# Altium PCB NBP8 Xilinx Virtex-II Pro BGA456 Rev1.01.PcbDoc (part 4 of 4)
Units mm, origin at the board's own origin, x right, y up, seen from the top; angles counter-clockwise.
Board outline 69 x 99.5 mm, 8 copper layers (Top Layer, InternalPlane1, InternalPlane2, MidLayer1, MidLayer2, MidLayer3, MidLayer4, Bottom Layer), stack 1.545 mm thick; 164 components, 314 nets, 1132 pads, 807 vias.
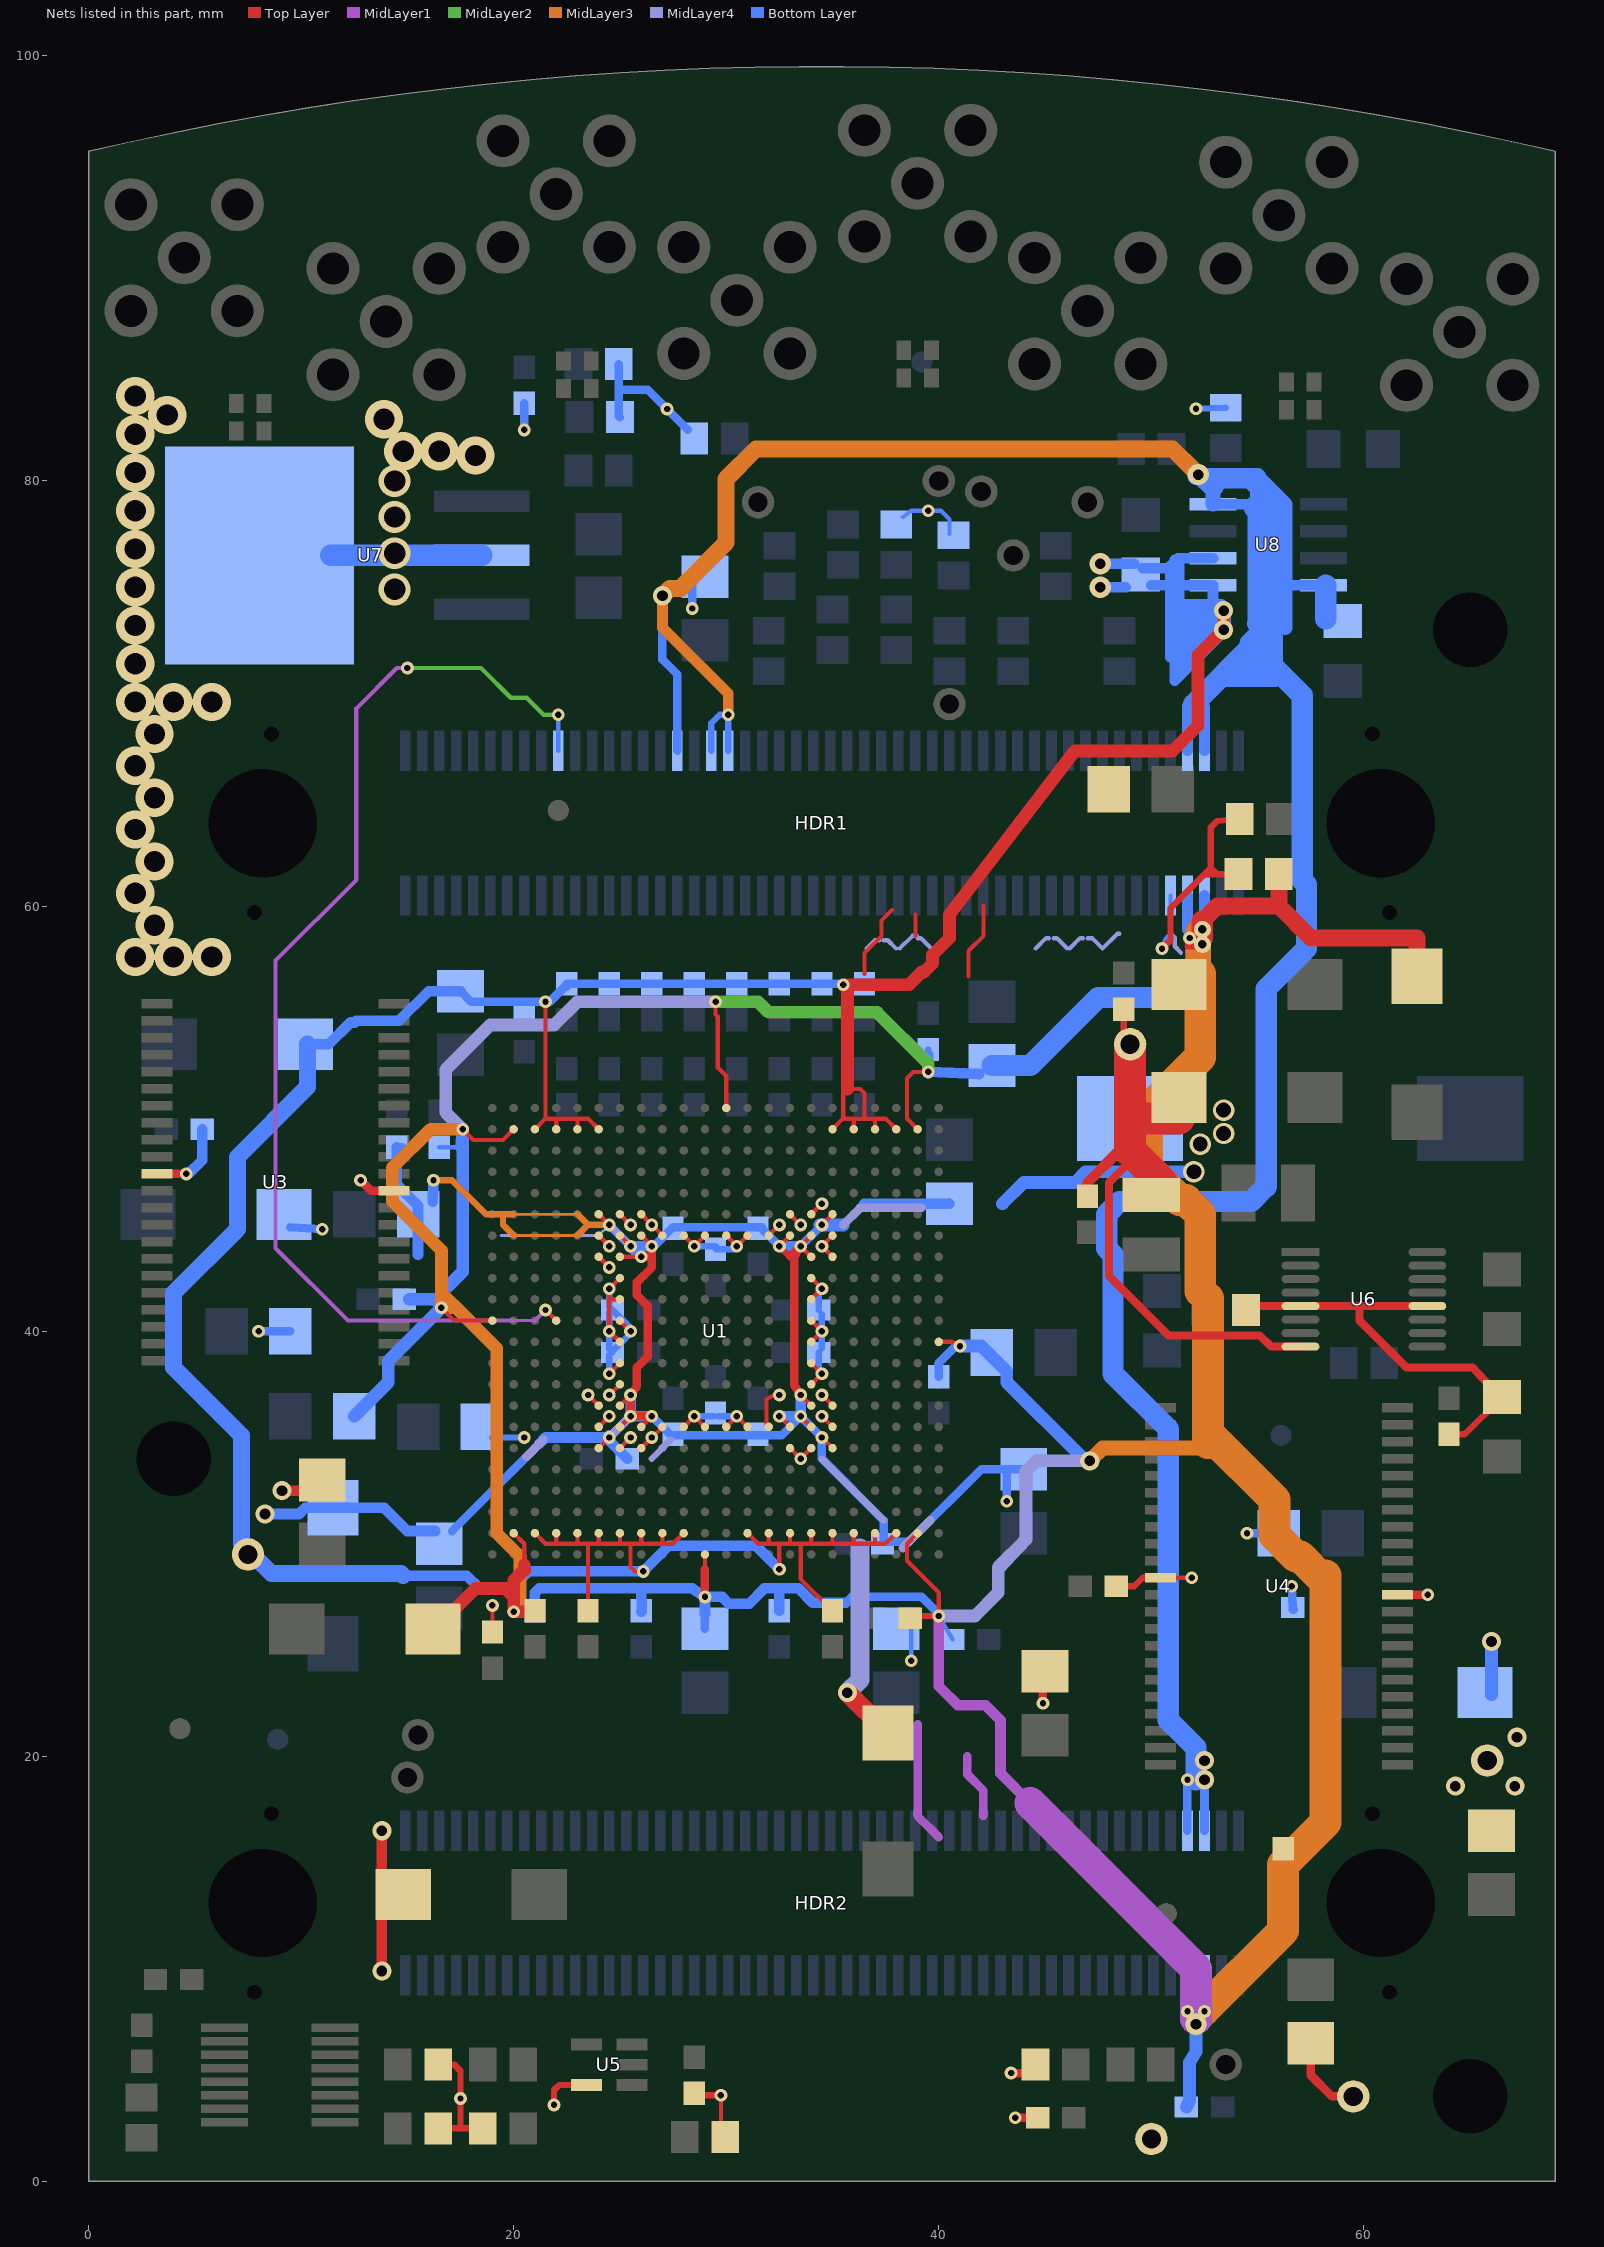
[diagram p10: the nets of this part, all layers, seen from the top]

## Via types
v1: diameter 0.6, hole 0.3, Top Layer to Bottom Layer, tented bottom, 695 vias
v2: diameter 0.9, hole 0.5, Top Layer to Bottom Layer, tented bottom, 45 vias
v3: diameter 1.8, hole 1, Top Layer to Bottom Layer, tented bottom, 26 vias
v4: diameter 1, hole 0.7, Top Layer to Bottom Layer, tented bottom, 17 vias
v5: diameter 1, hole 0.5, Top Layer to Bottom Layer, tented bottom, 15 vias
v6: diameter 1.5, hole 1, Top Layer to Bottom Layer, tented bottom, 4 vias
v7: diameter 0.8, hole 0.4, Top Layer to Bottom Layer, tented bottom, 3 vias
v8: diameter 0.9, hole 0.5, Top Layer to Bottom Layer, 2 vias

## Nets (pads, with @x,y where several pads share a name; then routed paths per layer and width w, separated by ;. In a path a pad name is that pad's centre, name@x,y a point inside that pad or via, vN(x,y) a via of type N, cw(c..) or ccw(c..) an arc to the next point about the centre after c; other vN are vias at no path point) (continued)
VCC: C9.1 C10.1 C11.1 C12.1 C13.1 C14.1 C15.1 C16.1 C17.1 C26.1 C27.1 C33.1 C35.1 C44.1 C45.1 C46.1 C47.1 C48.1 C49.1 C50.1 C56.1 C57.1 C58.1 C60.1 R10.1 R11.2 R12.1 R13.1 R14.2 R17.1 R19.2 R20.2 R23.1 R24.1 R27.2 TP11.1 U1.F7 U1.F8 U1.F15 U1.F16 U1.G6 U1.G9 U1.G10 U1.G11 U1.G12 U1.G13 U1.G14 U1.G17 U1.H6 U1.H17 U1.J7 U1.J16 U1.K7 U1.K16 U1.L7 U1.L16 U1.M7 U1.M16 U1.N7 U1.N16 U1.P7 U1.P16 U1.R6 U1.R17 U1.T6 U1.T9 U1.T10 U1.T11 U1.T12 U1.T13 U1.T14 U1.T17 U1.U7 U1.U8 U1.U15 U1.U16 U3.11 U3.33 U4.11 U4.33 U5.5 U7.2 U7.4 | length 118.6
  Top Layer w0.2: C33.1@19,25.85 v1(19,27.1) ; v1(23.5,37) U1.H17@24,36.5 ; U1.G17@24,35.5 v1(24.5,36) ; U1.R17@24,43.5 v1(24.5,43) ; U1.T17@24,44.5 v1(24.5,44) ; v1(24.5,37) U1.J16@25,37.5 ; v1(24.5,38) U1.K16@25,38.5 ; U1.L16@24.9,39.6 v1(24.5,40) 24.5,41.5 ; U1.F16@25,34.5 v1(25.5,35) ; U1.M16@25,40.4 25.1,40.4 v1(25.5,40) ; U1.N16@25,41.5 24.5,41.5 ; U1.P16@25,42.5 v1(24.5,42) 24.5,41.5 ; U1.U16@25,45.5 v1(25.5,45) ; U1.F15@26,34.5 v1(26.5,35) U1.G14@27,35.5 ; U1.U15@26,45.5 v1(26.5,45) U1.T14@27,44.5 ; U1.T13@28,44.5 v1(28.5,44) U1.T12@29,44.5 ; U1.G13@28.1,35.5 28.1,35.6 v1(28.5,36) U1.G12@29,35.5 ; R14.2@29.75,2.15 v1(29.75,4.05) ; U1.G11@30,35.5 v1(30.5,36) U1.G10@31,35.5 ; U1.T11@30,44.5 v1(30.5,44) U1.T10@31,44.5 ; U1.G9@32,35.5 31.9,35.6 31.9,36.8 32.25,37 v1(32.5,37) ; U1.T9@32,44.5 v1(32.5,45) ; U1.F8@33,34.5 v1(33.5,34) U1.F7@34,34.5 ; U1.U8@33,45.5 v1(33.5,45) ; U1.J7@34,37.5 v1(34.5,38) U1.K7@34,38.5 ; U1.L7@34,39.5 v1(34.5,40) U1.M7@34,40.5 ; U1.N7@34,41.5 v1(34.5,42) U1.P7@34,42.5 ; U1.U7@34,45.5 v1(34.5,46) ; v1(34.5,36) U1.G6@35,35.5 ; v1(34.5,37) U1.H6@35,36.5 ; U1.R6@35,43.5 v1(34.5,44) U1.T6@35,44.5 ; C44.1@44.9,24 44.95,24.05 C44.1@45,24.1 ; U4.11@50.5,28.4 v1(51.9,28.4)
  Top Layer w0.3: R17.1@16.45,2.5 17.5,2.5 ; R10.1@16.45,5.5 17.2,5.5 17.5,5.2 v1(17.5,3.9) 17.5,2.5 ; R20.2@18.55,2.5 17.5,2.5 ; v1(21.9,3.6) 21.9,4.3 22.141,4.541 U5.5@23.42,4.541 ; C35.1@28.5,4.05 v1(29.75,4.05) ; C27.1@48.35,28 49.2,28 49.6,28.4 U4.11@50.425,28.4
  Top Layer w0.4: U3.11@2.925,47.4 U3.11@3.225,47.4 4.4,47.4 v1(4.6,47.4) ; v1(12.8,47.1) 13.3,46.6 U3.33@14.375,46.6 U3.33@14.9,46.6 ; v1(43.4,5.1) 44.4,5.1 44.6,5.3 R19.2@44.6,5.5 ; v1(43.6,3) C13.1@44.65,3 C13.1@44.7,3 ; v1(44.9,22.5) C44.1@44.9,24 ; C60.1@57.5,6.5 57.5,5 58.5,4 TP11.1@59.5,4 ; U4.33@61.575,27.6 v1(63,27.6)
  Top Layer w0.5: v2(9.1,32.5) C46.1@11,32.5 ; v8(13.8,9.9) v8(13.8,16.5)
  Bottom Layer w0.2: R11.2@38.3,78.3 38.7,78.6 v1(39.5,78.6) 40.1,78.6 40.5,78.2 R13.1@40.5,77.5 ; v1(38.7,24.5) C48.1@38.7,26
  Bottom Layer w0.3: C50.1@19,35 v1(20.5,35) ; v1(24.5,38) 24.5,38.9 24.6,39 C14.1@24.65,39 24.5,39.15 v1(24.5,40) 24.5,40.9 24.6,41 C11.1@24.65,41 ; v1(24.5,42) 24.5,41.15 C11.1@24.65,41 ; C14.1@24.7,39.1 25.5,39.9 v1(25.5,40) 25.5,40.15 C11.1@24.65,41 ; v1(28.5,36) C12.1@29.4,36 ; v1(28.5,44) C10.1@29.5,44 ; C10.1@29.5,43.85 30.35,43.85 v1(30.5,44) ; C12.1@29.6,36 v1(30.5,36) ; C9.1@34.35,39 34.35,38.15 v1(34.5,38) ; C16.1@34.35,41 34.35,41.85 v1(34.5,42) ; C9.1@34.5,39.2 v1(34.5,40) C16.1@34.5,40.8 ; v1(52.1,83.4) R27.2@53.5,83.45
  Bottom Layer w0.4: v1(8,40) C47.1@9.5,40 ; C56.1@9.5,44.9 v1(11,44.8) ; v1(20.5,82.4) C17.1@20.5,83.65 ; R23.1@24.95,85.5 24.95,84.3 ; R24.1@25,83 24.95,83.05 24.95,84.3 ; R12.1@28.2,82.4 v1(27.218,83.382) 26.3,84.3 24.95,84.3 ; v1(28.4,74) C45.1@28.4,75.5 ; v1(54.5,30.5) C49.1@56,30.5 ; v1(56.6,28) 56.645,27 56.65,26.9 C15.1@56.7,26.9
  Bottom Layer w0.5: v1(4.6,47.4) 4.7,47.4 5.35,48.05 C26.1@5.35,49.5
  Bottom Layer w0.6: v2(66,25.4) 66,23 C57.1@66,22.9
  Bottom Layer w1: U7.4@11.4,76.5 14.4,76.5 U7.2@18.5,76.5
  other v3: 2.2,57.6 4,57.6 5.8,57.6 3.1,59.1 2.2,60.6 3.1,62.1 2.2,63.6 3.1,65.1 2.2,66.6 3.1,68.1 2.2,69.6 4,69.6 5.8,69.6 2.2,71.4 2.2,73.2 2.2,75 2.2,76.8 2.2,78.6 2.2,80.4 18.2,81.2 14.8,81.4 16.5,81.4 2.2,82.2 13.9,82.9 3.7,83.1 2.2,84
  other v6: 14.4,74.9 14.4,76.6 14.4,78.3 14.4,80
VCCAUX: C1.1 C2.1 C3.1 C4.1 C5.1 C6.1 C7.1 C28.1 C29.1 C30.1 C31.1 C36.1 C37.1 C38.1 C39.1 C51.1 C52.1 HDR1.93 HDR1.95 HDR2.93 HDR2.95 R15.1 TP14.1 U1.A12 U1.AA2 U1.AA21 U1.AB11 U1.B2 U1.B21 U1.L1 U1.M22 | length 312.9
  Top Layer w0.2: v1(16.6,41.1) 17.2,40.5 U1.M22@19,40.5 ; v1(17.6,49.5) 18.1,49 19.5,49 U1.AA21@20,49.5 ; 20,27.9 20,28.271 20,28.5 20.5,29 20.5,30 U1.B21@20,30.5 ; 29,28.8 U1.A12@29,29.5 ; v1(29.5,55.5) 29.5,54.9 29.6,54.8 29.6,52.4 30,52 U1.AB11@30,50.5 ; U1.B2@39,30.5 38.5,30 38.5,29.2 40,27.7 v1(40,26.6) ; U1.AA2@39,49.5 38.5,50 38.5,51.9 38.8,52.2 v1(39.5,52.2) ; U1.L1@40,39.5 40.6,39.5 v1@41,39.4
  Top Layer w0.3: C31.1@38.9,26.6 v1(40,26.6) ; 51.7,58.1 51.8,58.1 v7@52.4,58.1
  Top Layer w0.4: v1(29,27.5) 29,28.8
  Top Layer w0.6: C51.1@16.2,26 16.3,26 18.2,27.9 19.6,27.9 ; 20.5,29 20.5,28.771 ; 20.529,28.771 20.5,28.771 ; C30.1@20.7,26.8 v1(20,26.8) 20,27.5 ; 19.6,27.9 20,27.5 ; 19.6,27.9 20,27.9 ; 20,27.5 20,27.9 ; 20,27.9 20,28.271 20.5,28.771
  Top Layer w0.8: v7@52.4,59.3 53.1,60 56,60 ; R15.1@56,61.5 56,60 ; C52.1@62.5,56.7 62.5,58.5 57.5,58.5 56,60
  Top Layer w1: v7@52.4,58.5 v7(52.4,58.9) v7@52.4,59.3
  MidLayer1 w0.4: 39,21.5 39,17.2 40,16.2 ; 41.342,20 41.342,19.158 42.1,18.4 42.1,17.2
  MidLayer1 w0.5: v1(40,26.6) 40,23.3 40.9,22.4 42.2,22.4 42.9,21.7 42.9,19.2 44.3,17.8
  MidLayer1 w1.5: 44.3,17.8 52.1,10 52.1,8 v5@52.1,7.663
  MidLayer2 w0.6: v1(29.5,55.5) 31.5,55.5 32,55 37.1,55 39.5,52.6 v1(39.5,52.2)
  MidLayer3 w0.6: v1(17.6,49.5) 16.1,49.5 14.3,47.7 14.3,46.1 16.6,43.8 16.6,41.8 ; v1(20,26.8) 20.3,27.1 20.3,29.4 19.2,30.5 19.2,39.2 17.3,41.1 ; 16.6,41.8 v1(16.6,41.1) 17.3,41.1 ; 16.6,41.8 16.95,41.45 17.3,41.1
  MidLayer3 w0.7: v2(47.1,33.9) 47.7,34.5 52.3,34.5
  MidLayer3 w1.2: v7@52.2,58.8 52.2,58.5 52.2,58.2 52.2,56.9 52.3,56.8
  MidLayer3 w1.5: v5@52.1,7.7 52.45,8.05 56.2,11.8 56.2,14.9 58.2,16.9 58.2,28.5 57.9,28.5 57,29.4 56.8,29.4 55.8,30.4 55.8,32.069 52.669,35.2 ; 52.3,56.8 52.3,52.9 49.8,50.4 49.8,47.7 51.325,46.175 51.625,46.175 52.3,45.5 52.3,41.9 52.669,41.531 52.669,35.2 ; 52.669,34.731 52.669,35.2
  MidLayer4 w0.6: v1(17.6,49.5) 16.8,50.3 16.8,52.3 18.9,54.4 21.9,54.4 23,55.5 v1(29.5,55.5) ; v1(40,26.6) 41.7,26.6 42.8,27.7 42.8,28.8 44.1,30.2 ; 42.8,28.9 44.1,30.2 ; v2(47.1,33.9) 44.6,33.9 44.1,33.4 44.1,30.2
  Bottom Layer w0.2: C4.1@16.5,48.65 17.35,48.65 17.563,48.863 17.6,48.9 v1(17.6,49.5) v1@17.6,49.6 ; v1(20,26.8) 20.95,26.8 C1.1@21,26.85 ; v1(40,26.6) C2.1@40.65,25.5 ; HDR2.93@51.7,9.6 HDR2.93@51.7,9.7
  Bottom Layer w0.3: v1(39.5,52.2) C5.1@39.5,53.25
  Bottom Layer w0.38: C29.1@15.1,41.5 16.1,41.5 v1(16.6,41.1) ; v1(41,39.3) C39.1@41.8,39.3
  Bottom Layer w0.4: C37.1@29,26 v1(29,27.5) ; 35.617,27.217 35.9,27.5 39.2,27.5 40,26.7 v1(40,26.6) ; C7.1@40,37.85 40,38.5 40.8,39.3 v1(41,39.3) ; HDR2.93@51.7,9.6 v1(51.7,8) ; HDR2.95@52.5,9.7 v1(52.5,8) ; v1(51.7,8) 52.1,8 v1(52.5,8) ; v1(51.7,8) 51.7,7.8 v5(52.1,7.4) 52.5,7.8 v1(52.5,8)
  Bottom Layer w0.5: v1(20,26.8) 20.05,26.85 C1.1@21,26.85 21,27.7 21.2,27.9 26,27.9 ; C3.1@26,26.8 26.025,26.825 26.024,26.851 26,27.9 ; C37.1@29,26.7 v1(29,27.5) ; C6.1@32.5,26.85 32.5,27.9 ; 35.617,27.217 34.083,27.217 33.4,27.9 32.5,27.9 ; C5.1@39.5,53 v1(39.5,52.2) C38.1@41.9,52.1 ; 51.7,58.9 HDR1.93@51.7,60.5 ; v7@52.5,58.9 HDR1.95@52.5,60.5 ; 26,27.9 28.4,27.9 v1(29,27.5) ; v1(29,27.5) 29.8,27.5 30.114,27.186 31.086,27.186 31.8,27.9 32.5,27.9
  Bottom Layer w0.6: C36.1@12.5,36 14.1,37.6 14.1,38.6 v1(16.6,41.1) 16.6,41.5 ; C29.1@15.1,41.5 16.1,41.5 16.6,41.5 ; 17.55,48.65 17.563,48.863 v1(17.6,49.5) 17.6,48.9 17.6,42.8 16.6,41.8 16.6,41.5 ; v1(41,39.3) 42,39.3 42.4,38.9 43.2,38.1 43.2,37.6 46.7,34.1 v2(47.1,33.9) ; C28.1@51.65,3.5 51.8,3.8 51.8,5.6 52.1,6.1 v5(52.1,7.4)
  Bottom Layer w1: C38.1@42.5,52.5 44.3,52.5 47.5,55.7 50.9,55.7 52.1,56.9 52.1,58.2 v1@52.1,58.5
  other v1: 51.8,58.5
  other v7: 52.4,58.2
VCCIN: C76.1 C88.1 C93.2 HDR1.34 HDR1.38 HDR1.40 HDR1.94 HDR1.96 HDR2.94 HDR2.96 TP13.1 U8.4 U8.8 | length 182.7
  MidLayer3 w0.5: v2(27,74.6) 27,73.1 30.1,70 v1(30.1,69)
  MidLayer3 w0.8: v2(27,74.6) 27.351,74.951 27.851,74.951 30,77.1 30,80.1 31.4,81.5 51,81.5 v5@52,80.5
  Bottom Layer w0.3: HDR1.38@29.3,67.3 29.3,68.6 29.7,69 v1(30.1,69) HDR1.40@30.1,67.3 ; v1(51.7,18.9) 52.1,18.9 v2(52.5,18.9)
  Bottom Layer w0.4: v2(27,74.6) 27,71.6 27.7,70.9 HDR1.34@27.7,67.3 ; HDR2.94@51.7,16.5 v1(51.7,18.9) ; HDR2.96@52.5,16.5 v2(52.5,18.9)
  Bottom Layer w0.5: HDR1.94@51.7,67.3 51.7,69.4 52.089,69.789 ; HDR1.96@52.5,67.3 52.5,69.377 52.189,69.689 52.089,69.789 ; U8.8@52.9,78.905 54.695,78.905 55.5,78.1 55.5,74.1 55.5,73.2 54.653,72.353 52.089,69.789 ; 55.6,74.7 55.7,74.8 55.9,75 55.9,75.095 ; 55.6,75.6 55.7,75.5 56,75.2 ; 55.805,75.095 55.9,75.095 ; U8.4@58.2,75.095 U8.4@58.1,75.095 56.3,75.095 55.9,75.095
  Bottom Layer w0.7: U8.8@52.9,78.905 52.9,79.6 53,79.7 53.3,80 54.6,80 55,79.6 ; 54.4,80.2 55,80.2 56.3,78.9 56.3,78.2 ; 55,78.7 55,79.5 ; 55,80 55,79.6 ; 56.3,73.1 56.3,75.095 56.3,78.2 ; 55,79.5 55,79.6 ; 55,79.5 56.3,78.2
  Bottom Layer w0.8: v5@52.1,80.2 52.2,80.2 v5@52.3,80.2 ; v5(52.2,80.3) v5@52.3,80.2 ; 55,80.2 v5@52.5,80.2 ; v5@52.3,80.2 52.8,79.7 53,79.7 v5@52.5,80.2 ; v5@52.3,80.2 v5@52.5,80.2
  Bottom Layer w1: 52,69.5 52.189,69.689 54.653,72.153 54.653,72.353 57.1,69.905 57.1,61.2 57.3,61 57.3,58 55.4,56.1 55.4,46.8 54.7,46.1 48.5,46.1 47.9,45.5 47.9,43.9 48.2,43.6 48.2,38 50.8,35.4 50.8,21.7 52.1,20.4 52.1,19.8 v2@52.1,18.9 ; 53.6,70.8 55.8,70.8 55.2,71.4 54.5,71.4 ; 54.741,72.441 55.5,73.2 55.7,73.4 ; 54.836,78.764 55.5,78.1 55.7,77.9 55.7,75.5 55.7,74.8 55.7,73.4 ; 55,73.3 55.013,73.313 55.013,73.713 ; 55.013,78.587 55.013,73.713 ; 55.5,74.1 55.4,74.1 55.013,73.713 ; 55.7,71.459 55.7,73.4 ; C93.2@58.2,73.5 U8.4@58.2,75.095
  other v2: 64.3,18.6 67.1,18.6 52.5,19.8 67.2,20.9
VCCINT: C18.1 C19.1 C20.1 C21.1 C22.1 C23.1 C24.1 C25.1 C34.1 C40.1 C41.1 C42.1 C43.1 C53.1 C54.1 C55.1 C61.1 C62.2 L1.2 TP10.1 U1.F6 U1.F17 U1.G7 U1.G8 U1.G15 U1.G16 U1.H7 U1.H16 U1.R7 U1.R16 U1.T7 U1.T8 U1.T15 U1.T16 U1.U6 U1.U17 U6.8 | length 207.5
  Top Layer w0.2: U1.F17@24,34.5 v1(24.5,35) ; U1.U17@24,45.5 v1(24.5,45) ; U1.H16@25,36.5 v1(25.5,37) ; U1.R16@25,43.5 v1(26,43.5) ; U1.T16@25,44.5 v1(25.5,44) ; U1.G16@25.1,35.5 U1.G16@25,35.5 v1(25.5,36) ; U1.G15@26,35.5 v1(26.5,36) ; U1.T15@26,44.5 v1(26.5,44) ; v1(32.5,36) U1.G8@33,35.5 ; v1(32.5,44) U1.T8@33,44.5 ; v1(33.5,36) U1.G7@34,35.5 ; v1(33.5,37) U1.H7@34,36.5 ; U1.R7@34,43.5 v1(33.5,44) U1.T7@34,44.5 ; v1(34.5,35) U1.F6@35,34.5 ; v1(34.5,45) U1.U6@35,45.5 ; 55.6,39.3 55.622,39.278
  Top Layer w0.3: v1(32.5,44) 32.984,43.516 ; 32.984,43.484 32.984,43.516 ; C22.1@48.7,55.15 48.7,53.9 TP10.1@49,53.5 ; 32.984,43.516 33.468,44 v1(33.5,44) 33.2,43.3 32.984,43.516
  Top Layer w0.38: 48.8,47.8 48,47 48,42.6 50.8,39.8 55.1,39.8 55.6,39.3 ; 55.622,39.278 U6.8@57.015,39.278
  Top Layer w0.4: v1(26,43.5) 26.5,43.5 ; v1(26.5,36) v1(25.5,36) v1(25.5,37) 25.8,37.4 25.8,38.3 26.3,38.8 26.3,41.2 25.8,41.7 25.8,42.3 26.5,43 26.5,43.5 ; v1(26.5,44) 26.5,43.5 ; v1(33.5,37) 33.2,37.468 33.2,43.3 33.2,43.7 v1(33.5,44)
  Top Layer w0.5: C25.1@47,46.35 47,47 48.5,48.5
  Top Layer w0.9: v2(35.7,23) 37.5,21.2 37.5,21.1 C53.1@37.5,21
  Top Layer w1.5: TP10.1@49,53.5 49,50.5 ; C62.2@50.5,46.5 50.5,47 49,48.5 49,50.5 ; C61.1@51.3,50 49.5,50 49,50.5
  MidLayer3 w0.127: 20,44.5 23,44.5 ; 20,45.5 23,45.5
  MidLayer3 w0.3: v1(16.229,47.1) 17.1,47.1 18.7,45.5 19.5,45.5 ; 20,44.5 19.5,45 19.5,45.5 ; 20,45.5 19.5,45.5 ; 23,44.5 23.5,45 ; 23,45.5 23.5,45 ; v1(24.5,45) 23.5,45
  MidLayer4 w0.127: 19.4,44.5 23.4,44.5 24,44.5 v1(24.5,45) 23.474,45 22.974,45.5 19.4,45.5
  MidLayer4 w0.2: 21.403,34.811 21.403,34.903 21.408,34.908 ; 36.5,30 37.5,30 ; 36.607,58 37.001,58.394 37.2,58.394 ; 37.4,58.394 37.599,58.394 37.993,58 ; 38.158,58 38.758,58.6 38.958,58.6 ; 39.012,58.492 39.149,58.492 39.642,58 ; 44.558,58 45.051,58.492 45.188,58.492 ; 45.412,58.492 45.549,58.492 46.042,58 ; 46.158,58 46.651,58.492 46.788,58.492 ; 47.012,58.492 47.214,58.492 47.706,58 48.407,58.7 48.5,58.7 ; 51,58.625 51.1,58.524 51.1,58.107 51.4,57.807
  MidLayer4 w0.3: v1(24.5,45) v1(25.5,44) ; 26.499,34.001 27.401,34.903 ; 34.5,34 37.403,31.097
  MidLayer4 w0.4: 20.597,34.097 21.403,34.903 ; v1(24.5,35) v1(25.5,36) ; 35.5,45 36.265,45.764 ; 36.275,45.8 39.2,45.8 ; 38.3,29.8 39.6,31.1
  MidLayer4 w0.9: v2(35.7,23) 36.3,23.6 36.3,29.8
  Bottom Layer w0.3: v1(26.5,44) v1@26.6,44
  Bottom Layer w0.4: C34.1@14.5,48.65 C34.1@14.75,48.65 ; C42.1@17.1,30.6 21.2,34.7 ; v1(24.5,35) v1(25.5,36) ; v1(24.5,45) v1(25.5,44) ; v1(26.5,36) 27.4,35.1 27.5,35.1 31.5,35.1 32.6,35.1 v1(33.5,36) v1(34.5,35) 34.5,34 37.4,31.1 37.4,30.1 38.6,30.1 42,33.5 C40.1@44,33.5 ; v1@26.6,44 27.475,44.875 27.5,44.9 31.5,44.9 C18.1@31.6,44.9 ; C18.1@31.7,44.9 C18.1@31.6,44.9 ; v1(32.5,44) C18.1@31.6,44.9 ; v1(33.5,44) v1(34.5,45) 35.5,45 36.5,46 ; C43.1@40.487,46.072 C43.1@40.499,46.072 ; v1(43.2,32) C40.1@43.2,33.4
  Bottom Layer w0.5: v2(8.3,31.4) 9.9,31.4 10.2,31.7 C54.1@11.5,31.7 13.9,31.7 15,30.6 C42.1@16.3,30.6 ; C34.1@14.5,48.65 14.5,46.9 15.5,45.9 C41.1@15.5,45.5 15.5,43.6 ; C41.1@16.2,46.1 v1(16.229,47.1) ; 21.2,34.7 21.5,35 24.4,35 24.45,35.05 24.5,35.1 v1(24.5,35) 24.5,34.85 C24.1@25.35,34 ; v1(25.5,37) v1(25.5,36) v1(26.5,36) ; v1(26,43.5) v1(25.5,44) 26,44 v1(26.5,44) ; v1(32.5,36) v1(33.5,36) v1(33.5,37) ; v1(32.5,44) v1(33.5,44) ; 36.5,46 C43.1@40.5,46
  Bottom Layer w0.6: v1@34.4,45 v1(34.5,45) 35.5,45 ; 43,46 44,47 46.4,47 46.9,47.5 v4(52,47.5)
  other v4: 52.3,48.8 53.4,49.3 53.4,50.4
VCCRIO: C77.1 C78.1 C79.1 C89.1 C90.1 C91.1 C92.2 L2.2 L3.2 L4.2 L5.2 L6.2 L7.2 L8.2 L9.2 TP12.1 U1.AA3 U1.AA4 U1.AA5 U1.AA6 U1.AA17 U1.AA18 U1.AA19 U1.AA20 U1.B3 U1.B4 U1.B5 U1.B6 U1.B7 U1.B8 U1.B9 U1.B10 U1.B13 U1.B14 U1.B15 U1.B16 U1.B17 U1.B18 U1.B19 U1.B20 U8.5 U8.6 | length 223.1
  Top Layer w0.2: U1.B20@21,30.5 21.5,30 23.5,30 ; U1.AA20@21,49.5 21.5,50 ; v1(21.5,55.5) 21.5,50 ; 22,30 U1.B19@22,30.5 ; U1.AA19@22,49.5 22,50 ; 23,30 U1.B18@23,30.5 ; U1.AA18@23,49.5 23,50 ; C78.1@23.5,26.85 23.5,30 ; 24,30 U1.B17@24,30.5 ; U1.AA17@24,49.5 23.5,50 23,50 ; 25,30 U1.B16@25,30.5 ; 26,30 U1.B15@26,30.5 ; v1(26.1,28.7) 25.7,28.7 25.5,28.9 25.5,30 ; 27,30 U1.B14@27,30.5 ; U1.B13@28,30.5 27.5,30 25.5,30 ; U1.B10@31,30.5 31.5,30 32,30 ; U1.B9@32,30.5 32,30 ; v1(32.5,28.8) 32.5,30 ; U1.B8@33,30.5 33,30 ; U1.B7@34,30.5 34,30 ; C79.1@35,26.85 33.5,28.35 33.5,30 ; U1.B6@35,30.5 35,30 ; U1.AA6@35,49.5 35.5,50 ; v1(35.5,56.3) 35.5,51.4 ; 36,30 U1.B5@36,30.5 ; U1.AA5@36,49.5 36,50 ; 36.5,56.8 36.5,57.8 37.3,58.6 37.3,59.317 37.8,59.817 ; 37,30 U1.B4@37,30.5 ; U1.AA4@37,49.5 37,50 ; U1.B3@38,30.5 37.5,30 35,30 ; U1.AA3@38,49.5 37.5,50 37,50 ; 38.9,58.6 38.9,59.6 ; 41.4,56.7 41.4,57.9 42.1,58.6 42.1,60 ; 21.5,50 23,50 ; 23.5,30 25.5,30 ; 32,30 32.5,30 ; 32.5,30 33,30 ; 33,30 33.5,30 ; 33.5,30 34,30 ; 34,30 35,30 ; 35.5,50 36,50 ; 35.5,50 35.5,51.4 ; 35.5,51.4 35.7,51.4 36.3,51.4 36.5,51.2 36.5,50 ; 36,50 36.5,50 ; 36.5,50 37,50
  Top Layer w0.6: 35.7,51.4 35.7,56.1 v1(35.5,56.3) 38.6,56.3 39.2,56.9 39.3,56.9 39.7,57.3 39.7,57.7 40.5,58.5 40.5,59.6 46.4,67.3 51,67.3 52.2,68.5 52.2,71.8 v2(53.4,73) v2(53.4,73.9)
  Bottom Layer w0.4: C89.1@17.5,56 18,55.5 20.5,55.5 v1(21.5,55.5) 21.7,55.5 L2.2@22.5,56.3 ; L2.2@22.5,56.2 L2.2@22.5,56.3 ; L8.2@36.5,56.35 35.5,56.35 L9.2@34.5,56.35 L7.2@32.5,56.35 L6.2@30.5,56.35 L4.2@28.5,56.35 L5.2@26.5,56.35 L3.2@24.5,56.35 L2.2@22.5,56.35 L2.2@22.5,56.3
  Bottom Layer w0.5: C91.1@10.2,53.5 10.3,53.5 11.3,53.5 12.323,54.523 12.523,54.523 12.6,54.6 14.6,54.6 16,56 C89.1@17.5,56 ; 14.8,28.5 17.8,28.5 18.4,27.9 19.9,27.9 20.7,28.7 v1(26.1,28.7) 27.3,29.9 31.4,29.9 v1(32.5,28.8) ; v5(47.6,75) C92.2@48.8,75 ; v5(47.6,76.1) C92.2@49.2,76.1 ; C92.2@49.6,75.9 50.8,75.9 50.9,76 ; C92.2@50,75.1 50.005,75.095 50.9,75.095 ; 51.1,76.3 51.1,76.2 ; U8.6@52.9,76.365 51.265,76.365 51.1,76.2 ; 50.9,75.095 50.9,71.7 51.1,71.9 ; 50.9,75.095 50.9,76 ; 50.9,75.095 51.1,75.095 ; 50.9,76 51,76.1 ; 51,76.1 51.1,76.1 ; 51,76.1 51.1,76.2 ; 51.1,71.9 51.4,72.2 ; 51.1,71.9 51.1,70.6 53.45,72.95 53.5,73 53.5,73.9 53.5,74 53.3,74.2 52.9,74.2 ; 51.1,71.9 51.1,73.9 ; 51.1,73.9 51.25,74.05 ; 51.1,73.9 51.1,74.2 ; 51.1,74.2 51.25,74.05 ; 51.1,74.2 51.1,75.095 ; 51.1,74.2 51.3,74.2 ; 51.1,75.095 51.1,76.1 ; 51.1,75.095 51.3,75.095 ; 51.1,76.1 51.1,76.2 ; 51.1,76.1 51.3,76.1 51.3,75.095 ; 51.25,74.05 51.3,74.1 51.3,74.2 ; 51.25,74.05 51.4,73.9 51.4,72.2 ; 51.3,74.2 51.3,75.095 ; 51.3,74.2 52.9,74.2 ; 51.3,75.095 U8.5@52.9,75.095 52.9,74.2 ; 51.4,72.2 51.7,72.5 ; 51.4,72.2 51.4,71.4 53,73 53,73.9 52.9,73.8 52.7,73.8 ; 51.7,72.5 51.9,72.7 51.9,73 ; 51.7,72.5 51.7,72.2 52.6,73.1 52.6,73.5 52.4,73.5 51.9,73 ; 51.7,72.5 51.7,73.7 51.6,73.8 51.9,73.8 ; 51.9,73 51.9,73.8 ; 51.9,73.8 52.7,73.8 ; 52.7,73.8 52.9,74 52.9,74.2
  Bottom Layer w0.8: C91.1@10.3,53.5 10.3,51.5 7,48.2 7,44.8 4,41.8 4,38.3 7.2,35.1 7.2,30 7.6,29.6 8.6,28.6 14.7,28.6 14.8,28.5
VDRIVE: HDR1.20 U1.M19 | length 54.9
  Top Layer w0.2: v1(21.5,41) U1.M19@22,40.5
  MidLayer1 w0.127: 20,40.5 21,40.5
  MidLayer1 w0.2: v1(15,71.2) 14.5,71.2 12.6,69.3 12.6,61.234 8.8,57.434 8.8,43.9 12.2,40.5 20,40.5 ; 21,40.5 v1(21.5,41)
  MidLayer2 w0.2: v1(15,71.2) 18.466,71.2 19.866,69.8 20.6,69.8 21.4,69 v1(22.1,69)
  Bottom Layer w0.2: HDR1.20@22.1,67.3 v1(22.1,69)
VFILT: C64.1 C65.2 R21.1 U6.5 U6.12 | length 20.4
  Top Layer w0.3: C64.1@64,35.15 64.75,35.15 C65.2@66.5,36.9
  Top Layer w0.38: R21.1@54.517,41.183 U6.5@57.015,41.183 59.8,41.183 ; U6.12@62.385,41.183 59.8,41.183 ; C65.2@66,37 C65.2@66.3,37 ; C65.2@66.6,37 66.5,37 C65.2@66.3,37 ; 59.8,41.183 59.8,40.5 62,38.3 65.1,38.3 C65.2@66.3,37
VREF: HDR1.91 R15.2 R16.1 | length 13.1
  Top Layer w0.3: v1(50.5,58) 50.9,58.4 50.9,59.9 52.5,61.5 ; R15.2@54.1,61.5 53.1,61.5 ; R16.1@54.15,64.1 53.1,64 52.8,63.7 52.8,61.8 ; 52.5,61.5 52.8,61.8 ; 52.5,61.5 52.8,61.5 ; 52.8,61.5 53.1,61.5 ; 52.8,61.5 52.8,61.8 ; 52.8,61.8 53.1,61.5
  Bottom Layer w0.2: v1(50.5,58) 50.7,58.5 50.9,58.7 HDR1.91@50.9,60.5
pads on no net: HDR1.MH1 HDR1.MH2 HDR1.MH3 HDR1.MH4 HDR1.MH5 HDR1.MH6 HDR2.MH1 HDR2.MH2 HDR2.MH3 HDR2.MH4 HDR2.MH5 HDR2.MH6 U1.A3 U1.A4 U1.A5 U1.A6 U1.A7 U1.A8 U1.A9 U1.A10 U1.A13 U1.A14 U1.A15 U1.A16 U1.A17 U1.A18 U1.A19 U1.A20 U1.AB3 U1.AB4 U1.AB5 U1.AB6 U1.AB17 U1.AB18 U1.AB19 U1.AB20 U1.C18 U1.C19 U1.Y19 U2.1 U2.5 U2.9 U2.13 U2.16 U5.1 U6.11 U8.2

## Polygon pours and split planes (outlines as drawn)
VCCIN on Top Layer "Top Layer-VCCIN" (solid, remove dead copper, pour order 1000): 50.8,15.1 69,15.1 69,21.6 50.8,21.6
VCCRIO on Top Layer "Top Layer-VCCRIO" (solid, remove dead copper, pour order 1001): 53.2,78.1 58.4,72.9 56,70.5 56,65.2 37.8,47 32,52.8 29.8,55
GND on Top Layer "Top Layer-GND" (solid, remove dead copper, pour order 1002): 0,99.5 69,99.5 69,0 0,0
VCC on Top Layer "Top Layer-VCC" (solid, remove dead copper, pour order 1003): 0,99.5 0,53 23,53 23,99.5
GND on MidLayer1 "MidLayer1-GND" (solid, remove dead copper, pour order 1004): 0,99.5 69,99.5 69,0 0,0
VCCAUX on MidLayer1 "MidLayer1-VCCAUX" (solid, remove dead copper, pour order 1005): 36.1,31.5 36.1,0 57.1,0 57.1,31.5
GND on MidLayer2 "MidLayer2-GND" (solid, remove dead copper, pour order 1006): 0,99.5 69,99.5 69,0 0,0
GND on MidLayer3 "MidLayer3-GND" (solid, remove dead copper, pour order 1007): 0,99.5 69,99.5 69,0 0,0
VCCIN on MidLayer3 "MidLayer3-VCCIN" (solid, remove dead copper, pour order 1008): 25.5,82.7 25.5,67.1 31.5,67.1 37.4,73 60.2,73 60.2,16.6 68.7,16.6 68.7,82.5 26.8,82.5
VCCAUX on MidLayer3 "MidLayer3-VCCAUX" (solid, remove dead copper, pour order 1009): 13.5,50.3 21.3,50.3 21.3,23 13.6,23 13.6,50.3
VCCAUX on MidLayer3 "MidLayer3-VCCAUX 1" (solid, remove dead copper, pour order 1010): 44.9,60.7 44.9,5.6 55.1,5.6 61,11.5 61,60.5 44.9,60.5
GND on MidLayer4 "MidLayer4-GND" (solid, remove dead copper, pour order 1011): 0,99.5 69,99.5 69,0 0,0
VCCINT on MidLayer4 "MidLayer4-VCCINT" (solid, remove dead copper, pour order 1012): 7.4,60.4 54.2,60.4 54.2,29.5 7.487,29.5
GND on Bottom Layer "Bottom Layer-GND" (solid, remove dead copper, pour order 1013): 0,99.7 69,99.7 69,0 0,0
VCCINT on Bottom Layer "Bottom Layer-VCCINT" (solid, remove dead copper, pour order 1014): 0,56.4 69,56.4 69,21.3 0,21.3
VCC on Bottom Layer "Bottom Layer-VCC" (solid, remove dead copper, pour order 1015): 0,99.6 35,99.6 35,50.1 0,50.1
GND on InternalPlane1 (split plane): 36.23,98.49 37.96,98.46 39.69,98.41 41.418,98.34 43.146,98.251 44.873,98.141 46.598,98.011 48.322,97.861 50.044,97.692 51.764,97.502 53.481,97.293 55.196,97.064 56.908,96.815 58.617,96.546 60.323,96.258 62.026,95.95 63.725,95.622 65.42,95.275 67.11,94.908 67.998,94.704 67.999,1.001 1.001,1.001 1.002,94.704 1.89,94.908 3.58,95.275 5.275,95.622 6.974,95.95 8.677,96.258 10.383,96.546 12.092,96.815 13.804,97.064 15.519,97.293 17.236,97.502 18.956,97.692 20.678,97.861 22.402,98.011 24.127,98.141 25.854,98.251 27.582,98.34 29.31,98.41 31.04,98.46 32.77,98.49 34.5,98.5
VCC on InternalPlane2 (split plane): 36.23,98.49 37.96,98.46 39.69,98.41 41.418,98.34 43.146,98.251 44.873,98.141 46.598,98.011 48.322,97.861 50.044,97.692 51.764,97.502 53.481,97.293 55.196,97.064 56.908,96.815 58.617,96.546 60.323,96.258 62.026,95.95 63.725,95.622 65.42,95.275 67.11,94.908 67.998,94.704 67.999,1.001 1.001,1.001 1.002,94.704 1.89,94.908 3.58,95.275 5.275,95.622 6.974,95.95 8.677,96.258 10.383,96.546 12.092,96.815 13.804,97.064 15.519,97.293 17.236,97.502 18.956,97.692 20.678,97.861 22.402,98.011 24.127,98.141 25.854,98.251 27.582,98.34 29.31,98.41 31.04,98.46 32.77,98.49 34.5,98.5

## Keep-outs
Top Layer:
  circle w0.254: c50.7,12.6 r3.306
  circle w0.254: c4.3,21.3 r3.306
  circle w0.254: c22.1,64.5 r3.306
Bottom Layer:
  circle w0.254: c39.2,85.6 r3.324
  circle w0.254: c56.1,35.1 r3
  circle w0.254: c8.9,20.8 r3
  rectangle: 53.6,85.8 58.6,88.2
Keep-Out Layer:
  lines w0.2: 0.8,0.8 0.8,86.942 cw(c2,88) 0.8,89.058 0.8,91.942 cw(c2,93) 0.8,94.058 0.8,94.865 cw(c34.5,-51.301) 68.2,94.865 68.2,90.558 cw(c67,89.5) 68.2,88.442 68.2,85.558 cw(c67,84.5) 68.2,83.442 68.2,0.8 0.8,0.8
Mechanical 7:
  lines w0.2: 53.545,85.751 53.545,88.291 58.625,88.291 58.625,85.751 53.545,85.751

## Other copper
Top Layer:
  rectangle net VCCINT: 50.7,51.2 51.9,56.9
  rectangle net VCCAUX: 51.5,57.9 52.8,59.6
  rectangle net VCCINT: 51.9,49.2 52.7,50
  rectangle net VCCINT: 48.9,46.1 52.3,52.7
  rectangle net GND: 64.2,41.2 67.8,46.7
  rectangle net NetL1_1: 58.2,42.453 61.8,45.4
  rectangle net GND: 64.2,40.6 65.3,41.7
  rectangle net NetL1_1: 58.7,41.7 61.2,43
  rectangle net 5V: 53.3,42.3 55.7,47.8
  rectangle net VCCINT: 51.3,48.2 54,52.7
  rectangle net VCCINT: 51.1,45.6 53,48.5
  rectangle net GND: 56.2,45.7 60.5,57.7
  rectangle net GND: 57.3,45.7 67.7,53.5
  rectangle net 5V: 52.1,42.1 55.7,44.7
Bottom Layer:
  rectangle net VCCIN: 56,69.2 57.6,72.3
  rectangle net VCCIN: 54.9,70.4 57.7,72.4
  rectangle net VCCIN: 54.8,72 60.3,74.3
  rectangle net NetL1_1: 58.5,41.7 61.6,45.1
  rectangle net NetL1_1: 59.3,48.2 63.1,51.8
  rectangle net VCCAUX: 51.5,57.7 52.7,59.4
  rectangle net GND: 54.6,66.9 55.5,69.3
  rectangle net GND: 53.1,68.5 55.5,69.3
  rectangle net VCCINT: 46.5,47 53.9,52
  rectangle net 5V: 53.1,58 55,59.4
  rectangle net VCC: 12,72 15.7,81.6
  rectangle net VCC: 3,70.9 13.6,82.1
  rectangle net 5V: 52.9,42.2 55.8,44.5
  rectangle net VCCRIO: 49.8,73.4 51.1,74.5
  rectangle net GND: 53.3,18 54.9,20
  rectangle net VCCIN: 51.2,18.6 52.4,20.7

## Silkscreen, mask and mechanical layers (free items; w line width, h text height)
Top Overlay:
  lines w0.08: 13,1.1 14,1.4 ; 13.9,22 14.8,21.5 ; 16.1,6.8 16.1,8.6 ; 19.3,6.9 19.3,8.4 ; 23.9,7.4 23.9,8.5 ; 28.1,6.7 28.1,8.4 ; 30.7,77.6 31.2,78.3 ; 38.4,79.3 39.2,79.7 ; 40.8,77.6 41.6,78.7 ; 43.1,8.2 44.1,6.6 ; 44.1,76 45.5,75.2 ; 47.8,78.9 48.5,78.8 ; 47.9,6.9 47.9,8.2 ; 53.7,6.5 54.2,8.4 ; 57.9,46.6 58.9,46.6 ; 65.9,20.7 66.2,21.8
  lines w0.2: 8.1,91.2 9.9,94.1 ; 14.1,91 14.1,91.8 ; 15.7,94.9 18.4,93.7 ; 30.6,92 30.6,92.7 ; 32.3,96 35.5,93.9 ; 47,91.5 47,92.2 ; 49.5,95.3 52.5,92.7 ; 64.4,90.5 64.4,91.2
  text "RX1N" at 29.7,96.4 h1.4
  text "TX1P" at 46.8,95.7 h1.4
  text "TX0P" at 12.7,95.4 h1.4
  text "RX0N" at 7.2,94.6 h1.4
  text "TX0N" at 28,93.1 h1.4
  text "RX1P" at 44.6,92.6 h1.4
  text "RX0P" at 11.5,92.2 h1.4
  text "TX1N" at 61.8,91.6 h1.4
Bottom Overlay:
  drawing of 857 lines, arcs and shapes, not listed
  text "1" at 13.97,58.42 h1.2
  text "1" at 14.224,7.62 h1.2
  text "REV 1.01" at 36.5,2.7 h1.3
  text "NBP8" at 42.7,2.7 h1.3
PCB Boundary:
  lines w0.2: 0,0 0.001,95.5 cw(c34.5,-51.301) 68.999,95.5 69,0 0,0
  text "PCB boundary coincides with centre-line of tracks and arc" at 0,-12 h0.75
Gerber ID:
  text ".Layer_Name" at 0,-6 h0.75
Printout ID:
  text ".Printout_Name" at 0,-10 h0.75
Mechanical 5:
  circle w0.254: c64.5,87 r8
  circle w0.254: c56,92.5 r8
  circle w0.254: c39,94 r8
  circle w0.254: c47,88 r8
  circle w0.254: c22,93.5 r8
  circle w0.254: c30.5,88.5 r8
  circle w0.254: c14,87.5 r8
  circle w0.254: c4.5,90.5 r8
  circle w0.254: c4.5,90.5 r4.7
  circle w0.254: c14,87.5 r4.7
  circle w0.254: c22,93.5 r4.7
  circle w0.254: c30.5,88.5 r4.7
  circle w0.254: c39,94 r4.7
  circle w0.254: c56,92.5 r4.7
  circle w0.254: c47,88 r4.7
  circle w0.254: c64.5,87 r4.7
Mechanical 7:
  circle w0.2: c57.355,87.021 r0.6
  circle w0.2: c54.815,87.021 r0.6
  lines w0.2: 0.001,77 cw(c34.5,-69.801) 68.999,77 ; 0.001,79.5 cw(c34.5,-67.301) 68.999,79.5 ; 0,0 0.001,95.5 cw(c34.5,-51.301) 68.999,95.5 69,0 0,0
Design Information:
  drawing of 719 lines, arcs and shapes, not listed
  text "NBP8 REV 1.01" at 317.627,202.041 h1.27
  text "DESIGN INFORMATION" at 261.62,201.914 h1.52
  text "BOARD NAME:" at 299.212,201.914 h1.52
  text "BOARD TECHNOLOGY" at 261.62,199.374 h1.52
  text "BOARD SIZE (REFER ALSO PROFILING INFORMATION)" at 309.88,199.374 h1.27
  text "69.00mm" at 312.6,197.1 h1.52
  text "15.000" at 277.419,197.012 h1.52
  text "99.50mm" at 335.6,197 h1.52
  text "5.000" at 291.389,196.885 h1.52
  text "5" at 266.446,196.834 h1.52
  text "X" at 328.549,196.326 h1.78
  text "(MIN. TRACK/   PADS  /   CLEARANCE     IN 0.001'')" at 260.096,194.294 h1.27
  text "MINIMUM ANNULAR RING 0.05MM (0.002'') EXTERNAL PER IPC-2221 CLASS 3 LEVEL C AND IS THE" at 261.62,191.754 h1.27
  text "MANUFACTURING REGISTRATION ALLOWANCE" at 261.62,189.468 h1.27
  text "LAND SIZE CALCULATION MINIMUM - NOMINAL HOLE SIZE + 0.508MM (0.020'')" at 261.62,186.674 h1.27
  text "AS INSTRUCTED" at 347.65,182.28 h1.52
  text "X" at 299.263,182.153 h1.52
  text "CIRCUIT TYPE:" at 261.62,182.102 h1.52
  text "SS" at 284.48,182.102 h1.27
  text "DS" at 302.26,182.102 h1.27
  text "X" at 316.865,182.102 h1.52
  text "PTH" at 320.04,182.102 h1.27
  text "ML" at 330.962,182.102 h1.27
  text "X" at 334.772,182.102 h1.52
  text "No. OFF" at 337.82,182.102 h1.27
  text "FINGER CONNECTOR DIM PER:" at 261.62,179.054 h1.52
  text "AS SHOWN" at 337.82,179.054 h1.27
  text "No. OFF TOTAL" at 278.384,176.26 h1.52
  text "ONE SIDE" at 320.04,176.26 h1.27
  text "BOTH SIDES" at 337.82,176.006 h1.27
  text "VIAS:" at 261.62,173.339 h1.52
  text "NONE" at 273.05,173.339 h1.14
  text "X" at 281.432,173.339 h1.52
  text "FEED THRU'" at 284.48,173.339 h1.14
  text "X" at 299.212,173.339 h1.52
  text "TENTED" at 302.26,173.339 h1.14
  text "BURIED LAYER SEQUENCE" at 320.04,173.339 h1.14
  text "UNIQUE DRILL" at 284.48,170.291 h1.14
  text "2 SIZE" at 302.26,170.291 h1.14
  text "BLIND LAYER SEQUENCE" at 320.04,170.291 h1.14
  text "Layer Stack Manager (Protel)" at 297.053,168.005 h1.27
  text "X" at 334.772,168.005 h1.52
  text "AS SHOWN" at 337.82,168.005 h1.27
  text "LAYER CONSTRUCTION PER:" at 261.62,167.878 h1.52
  text "Protel" at 342.646,165.338 h1.27
  text "(PFW)" at 352.933,165.211 h1.27
  text "ARTWORK:" at 261.62,165.084 h1.52
  text "MANUAL" at 284.48,165.084 h1.27
  text "DIGITISED" at 302.26,165.084 h1.27
  text "X" at 316.992,165.084 h1.52
  text "CAD" at 320.04,165.084 h1.27
  text "TYPE" at 330.962,165.084 h1.27
  text "ARTWORK/PATTERN MASTER LIST" at 261.62,160.385 h1.52
  text "DESCRIPTION" at 262.89,157.972 h1.27
  text "DRAWING No./CAD FILE REF." at 281.559,157.972 h1.27
  text "LAYER NAME" at 322.834,157.972 h1.27
  text "GERBER FILE REF" at 343.586,157.896 h1.27
  text "PCB FILE" at 261.366,155.432 h1.27
  text "BOCD_Virtex_II_Pro_FG456" at 281.737,155.356 h1.27
  text "PcbDoc" at 312.979,155.356 h1.02
  text "Top Paste Mask" at 321.158,152.892 h1.02
  text "GTP" at 363.779,152.816 h1.27
  text "GERBER FILE" at 261.366,152.765 h1.27
  text "GTO" at 363.728,150.327 h1.27
  text "Top Overlay" at 321.158,150.301 h1.02
  text "GERBER FILE" at 261.366,150.225 h1.27
  text "Top Solder Mask" at 321.158,147.863 h1.02
  text "GTS" at 363.779,147.736 h1.27
  text "GERBER FILE" at 261.366,147.685 h1.27
  text "TOP LAYER" at 321.158,145.272 h1.02
  text "GTL" at 363.779,145.196 h1.27
  text "GERBER FILE" at 261.366,145.145 h1.27
  text "INTERNALPLANE1" at 321.158,142.732 h1.02
  text "GP1" at 363.779,142.656 h1.27
  text "GERBER FILE" at 261.366,142.605 h1.27
  text "INTERNALPLANE2" at 321.158,140.192 h1.02
  text "GP2" at 363.728,140.167 h1.27
  text "GERBER FILE" at 261.366,140.065 h1.27
  text "G1" at 363.728,137.754 h1.27
  text "MIDLAYER1" at 321.158,137.652 h1.02
  text "GERBER FILE" at 261.366,137.525 h1.27
  text "MIDLAYER2" at 321.158,135.112 h1.02
  text "G2" at 363.728,135.087 h1.27
  text "GERBER FILE" at 261.366,134.985 h1.27
  text "MIDLAYER3" at 321.158,132.572 h1.02
  text "G3" at 363.779,132.496 h1.27
  text "GERBER FILE" at 261.366,132.445 h1.27
  text "MIDLAYER4" at 321.158,130.032 h1.02
  text "G4" at 363.728,130.007 h1.27
  text "GERBER FILE" at 261.366,129.905 h1.27
  text "BOTTOMLAYER" at 321.158,127.492 h1.02
  text "GBL" at 363.779,127.416 h1.27
  text "GERBER FILE" at 261.366,127.365 h1.27
  text "Bottom Solder Mask" at 321.158,125.003 h1.02
  text "GBS" at 363.779,124.876 h1.27
  text "GERBER FILE" at 261.366,124.825 h1.27
  text "Bottom Overlay" at 321.158,122.412 h1.02
  text "GBO" at 363.779,122.336 h1.27
  text "GERBER FILE" at 261.366,122.285 h1.27
  text "Bottom Paste Mask" at 321.158,119.923 h1.02
  text "GBP" at 363.779,119.796 h1.27
  text "GERBER FILE" at 261.366,119.745 h1.27
  text "PCB Boundary" at 321.158,117.332 h1.02
  text "GM1" at 363.779,117.256 h1.27
  text "GERBER FILE" at 261.366,117.205 h1.27
  text "APERTURE LIST" at 261.366,114.792 h1.27
  text "APR" at 313.979,114.716 h1.27
  text "DRILL REPORT" at 261.366,112.252 h1.27
  text "DRR" at 313.979,112.176 h1.27
  text "EXCELLON DRILL" at 261.366,109.712 h1.27
  text "TXT" at 313.979,109.636 h1.27
  text "MATERIAL:" at 261.62,99.298 h1.52
  text "GLASS FIBRE EPOXY RESIN NEMA GRADE FR4 (MIL-S-13949H)" at 287.274,99.044 h1.27
  text "X" at 284.607,98.917 h1.52
  text "THICKNESS:" at 269.494,96.123 h1.27
  text "0.8mm" at 287.274,96.123 h1.27
  text "1.2mm" at 304.927,96.123 h1.27
  text "1.6mm" at 322.58,96.123 h1.27
  text "2.4mm" at 340.36,96.123 h1.27
  text "3.2mm" at 358.14,96.123 h1.27
  text "X" at 320.167,95.996 h1.52
  text "TOLERANCE:" at 269.367,93.075 h1.27
  text "IN A/W IPC-D-300G CLASS" at 287.02,93.075 h1.27
  text "3 LEVEL B" at 321.945,93.075 h1.27
  text "OTHER +/-" at 340.36,93.075 h1.27
  text "X" at 284.607,92.948 h1.52
  text "BOW & TWIST:" at 266.954,90.027 h1.27
  text "IN A/W IPC-D-300G CLASS" at 287.02,90.027 h1.27
  text "3 LEVEL B" at 321.945,90.027 h1.27
  text "AS SHOWN" at 340.487,89.9 h1.27
  text "X" at 284.607,89.773 h1.52
  text "COPPER THICKNESS (FINISHED)" at 269.367,86.725 h1.27
  text "OUTER:" at 274.193,84.439 h1.27
  text "18um" at 287.274,84.439 h1.27
  text "35um" at 314.325,84.439 h1.27
  text "70um" at 340.614,84.439 h1.27
  text "X" at 311.582,84.236 h1.52
  text "INNER SIGNAL:" at 265.811,81.391 h1.27
  text "18um" at 287.274,81.391 h1.27
  text "35um" at 314.325,81.391 h1.27
  text "70um" at 340.614,81.391 h1.27
  text "X" at 311.531,81.188 h1.52
  text "INNER PWR:" at 269.494,78.343 h1.27
  text "18um" at 287.274,78.343 h1.27
  text "35um" at 314.325,78.343 h1.27
  text "70um" at 340.614,78.343 h1.27
  text "X" at 311.658,78.216 h1.52
  text "STRUCTURE:" at 261.62,75.295 h1.52
  text "REFER" at 287.274,75.295 h1.27
  text "AS PER DRAWING No." at 287.147,72.12 h1.27
  text "AS SHOWN" at 340.487,72.12 h1.27
  text "X" at 337.947,71.993 h1.52
  text "DRILLING:" at 261.62,69.326 h1.52
  text "VIEWED FROM:" at 266.573,67.04 h1.27
  text "COMPONENT SIDE" at 287.274,67.04 h1.14
  text "SOLDER SIDE" at 314.071,67.04 h1.14
  text "X" at 284.607,66.786 h1.52
  text "REFERENCE:" at 268.859,63.992 h1.27
  text "AS SHOWN" at 287.147,63.865 h1.14
  text "PATTERN MASTER LIST" at 314.198,63.865 h1.14
  text "X" at 337.947,63.865 h1.52
  text "NC_DRILL FILES" at 340.487,63.865 h1.14
  text "X" at 284.607,63.738 h1.52
  text "PTH MINIMUM COPPER THICKNESS:" at 274.701,60.944 h1.27
  text "20um" at 314.325,60.944 h1.27
  text "X" at 311.658,60.817 h1.52
  text "OTHER" at 340.487,60.817 h1.27
  text "NPTH:" at 275.209,57.896 h1.27
  text "TENTED" at 287.147,57.769 h1.14
  text "X" at 311.658,57.769 h1.52
  text "PADS REMOVED" at 314.198,57.769 h1.14
  text "REMOVE PADS" at 340.487,57.769 h1.14
  text "X" at 284.607,57.642 h1.52
  text "2nd DRILL" at 287.147,54.721 h1.14
  text "BOTH" at 314.198,54.721 h1.14
  text "AS SHOWN" at 326.517,54.721 h1.14
  text "NONE" at 340.487,54.721 h1.14
  text "BOARD FINISH:" at 261.62,51.8 h1.52
  text "X" at 284.607,51.673 h1.52
  text "ETCHING" at 287.147,51.673 h1.14
  text "REFER PATTERN MASTER LIST" at 314.198,51.673 h1.14
  text "LEGEND / SCREEN PRINT:" at 281.94,48.752 h1.27
  text "NONE" at 314.198,48.625 h1.14
  text "COMPONENT" at 326.517,48.625 h1.14
  text "SOLDER" at 340.487,48.625 h1.14
  text "X" at 323.977,48.498 h1.52
  text "X" at 337.947,48.498 h1.52
  text "COLOUR:" at 272.161,45.704 h1.27
  text "WHITE" at 287.147,45.577 h1.14
  text "YELLOW" at 314.198,45.577 h1.14
  text "OTHER" at 340.487,45.577 h1.14
  text "X" at 284.607,45.45 h1.52
  text "X" at 284.607,42.529 h1.52
  text "LIQUID PHOTOIMAGEABLE" at 287.147,42.529 h1.14
  text "SCREEN PRINT" at 326.517,42.529 h1.14
  text "MATTE" at 287.147,39.481 h1.14
  text "GLOSS" at 299.847,39.481 h1.14
  text "GREEN" at 314.198,39.481 h1.14
  text "BLUE" at 326.517,39.481 h1.14
  text "G/Y" at 340.487,39.481 h1.14
  text "OTHER" at 351.917,39.481 h1.14
  text "X" at 297.18,39.354 h1.52
  text "SOLDER MASK COLOUR:" at 261.62,36.56 h1.14
  text "BLACK" at 287.147,36.433 h1.14
  text "GREEN" at 299.847,36.433 h1.14
  text "YELLOW" at 314.198,36.433 h1.14
  text "BLUE" at 326.517,36.433 h1.14
  text "OTHER" at 340.487,36.433 h1.14
  text "X" at 284.48,36.306 h1.52
  text "TRACK FINISH:" at 261.62,33.512 h1.52
  text "X" at 284.607,33.385 h1.52
  text "SELECTIVE SOLDER (HASL)" at 287.147,33.385 h1.14
  text "REFLOW SOLDER" at 326.517,33.385 h1.14
  text "SELECTIVE GOLD" at 287.147,30.337 h1.14
  text "um  (AREA" at 314.198,30.337 h1.14
  text "sq. mm)" at 342.011,30.337 h1.14
  text "REFER PATTERN MASTER LIST" at 287.147,27.289 h1.14
  text "OTHER" at 326.517,27.289 h1.14
  text "EDGE BOARD" at 261.62,24.368 h1.52
  text "1.3um HARD GOLD OVER 5um     NICKEL / TIN-NICKEL" at 287.147,24.241 h1.14
  text "CONTACTS:" at 261.62,22.209 h1.52
  text "HARD FINISH GOLDE PLATE" at 287.147,21.193 h1.14
  text "OTHER" at 326.517,21.193 h1.14
  text "AS SHOWN" at 287.147,18.145 h1.14
  text "REFER" at 326.517,18.145 h1.14
  text "PROFILING:" at 261.62,15.097 h1.52
  text "AS DIMENSIONED, MEASURED AND CUT FROM SPECIFIED DATUM." at 287.147,15.097 h1.14
  text "X" at 284.607,14.97 h1.52
  text "REFER PCB BLANK DWG No." at 287.274,12.176 h1.27
  text "USE PROFILE / ROUTE TAPE SUPPLIED (REFER PATTERN MASTER LIST)" at 287.274,9.128 h1.27
  text "SQUARE CUT" at 287.274,6.08 h1.27
  text "N.C. ROUTE" at 305.054,6.08 h1.27
  text "V. SCORE" at 322.834,6.08 h1.27
  text "BLANK" at 340.614,6.08 h1.27
  text "ACCEPTABILITY:" at 261.62,3.413 h1.52
  text "MATERIALS AND WORKMANSHIP FOR ALL PRINTED WIRING BOARDS TO MEET" at 283.845,3.286 h1.27
  text "OR EXCEED THE REQUIREMENTS OF:" at 283.845,0.492 h1.27
  text "IPC-6011/12 AND IPC-A-600E" at 287.401,-2.175 h1.27
  text "1" at 322.961,-2.175 h1.27
  text "2" at 331.851,-2.175 h1.27
  text "X" at 329.184,-2.302 h1.52
  text "X" at 284.734,-2.429 h1.52
  text "3" at 340.741,-4.334 h1.27
  text "UL CERTIFICATION" at 287.401,-5.223 h1.27
  text "AUSTEL" at 322.961,-5.223 h1.27
  text "X" at 284.734,-5.35 h1.52
  text "ML-P-55110F GRP" at 286.893,-8.271 h1.02
  text "A" at 305.181,-8.271 h1.27
  text "B" at 314.071,-8.271 h1.27
  text "AS2546" at 322.961,-8.271 h1.27
  text "OTHER" at 340.741,-8.271 h1.27
  text "ADDITIONAL" at 261.62,-11.192 h1.52
  text "NONE" at 287.401,-11.446 h1.27
  text "SAMPLE PLAN" at 305.181,-11.446 h1.27
  text "MIL-P-55110E SERIAL Nos. PER ORDER" at 322.961,-11.446 h1.27
  text "REQUIREMENTS:" at 261.62,-13.605 h1.52
  text "NONE" at 287.401,-14.494 h1.27
  text "ML-P-55110F GRP" at 304.673,-14.494 h1.02
  text "A" at 322.961,-14.494 h1.27
  text "B" at 331.851,-14.494 h1.27
  text "IPC CLASS:" at 337.82,-14.494 h1.27
  text "1" at 353.314,-14.494 h1.27
  text "2" at 359.664,-14.494 h1.27
  text "3" at 366.014,-14.494 h1.27
  text "QUALITY RELEASE REPORT" at 305.181,-17.542 h1.27
  text "OTHER" at 345.694,-17.542 h1.27
  text "PER ORDER" at 354.203,-17.669 h1.27
  text "X" at 343.027,-17.796 h1.52
  text "NONE" at 305.181,-20.59 h1.27
  text "REQUIRED" at 322.961,-20.59 h1.27
  text "PER ORDER" at 345.821,-20.59 h1.27
  text "ELECTRICAL TEST:" at 261.62,-20.717 h1.52
  text "X" at 320.294,-20.717 h1.52
  text "NONE" at 305.181,-23.638 h1.27
  text "1 SIDE" at 322.834,-23.638 h1.14
  text "2 SIDES" at 334.01,-23.638 h1.14
  text "MIN. PITCH" at 345.694,-23.638 h1.27
  text "0.65mm" at 359.283,-23.638 h1.27
  text "SURFACE MOUNT:" at 261.62,-23.765 h1.52
  text "X" at 331.775,-23.841 h1.52
  text "NONE" at 305.181,-26.686 h1.27
  text "FOIL" at 322.961,-26.686 h1.27
  text "LEGEND" at 334.391,-26.686 h1.27
  text "REFER" at 345.694,-26.686 h1.27
  text "MANUFACTURER'S ID/LOGO:" at 261.62,-26.813 h1.52
  text "X" at 302.514,-26.94 h1.52
  text "ISO9001/AS3901" at 308.991,-29.734 h1.27
  text "NONE" at 345.694,-29.734 h1.27
  text "MANUFACTURER'S ACCREDITATION:" at 261.62,-29.861 h1.52
  text "X" at 306.324,-29.861 h1.52
  text "PER ORDER" at 305.181,-32.782 h1.27
  text "REFER" at 322.961,-32.782 h1.27
  text "PACKAGING AND HANDLING:" at 261.62,-32.909 h1.52
  text "X" at 302.514,-33.036 h1.52
Sheet:
  drawing of 1882 lines, arcs and shapes, not listed
  text "1" at 3.717,207.391 h1.78
  text "2" at 52.756,207.391 h1.78
  text "3" at 102.015,207.391 h1.78
  text "4" at 151.308,207.391 h1.78
  text "5" at 200.584,207.391 h1.78
  text "6" at 249.606,207.391 h1.78
  text "7" at 299.136,207.391 h1.78
  text "8" at 348.158,207.391 h1.78
  text "A" at -18.415,173.406 h1.78
  text "A" at 370.205,173.406 h1.78
  text "B" at -18.415,102.794 h1.78
  text "B" at 370.205,102.794 h1.78
  text "C" at -18.415,32.182 h1.78
  text "C" at 370.205,32.182 h1.78
  text "D" at -18.415,-37.922 h1.78
  text "D" at 370.205,-37.922 h1.78
  text "ENGINEER:" at 255.27,-38.1 h1.14
  text "TITLE:" at 293.37,-38.1 h1.14
  text "PCB DESIGNER:" at 255.27,-45.593 h1.14
  text "DATE:" at 255.27,-53.34 h1.14
  text "PART NO.:" at 293.37,-53.34 h1.14
  text "REV:" at 346.71,-53.34 h1.14
  text "Altium Limited" at 222.25,-55.88 h1.78
  text ".PRINT_DATE" at 256.54,-56.388 h1.78
  text "12a Rodborough Rd" at 222.25,-58.42 h1.78
  text "Frenchs Forest" at 222.25,-60.96 h1.78
  text "FILE NAME:" at 255.27,-60.96 h1.14
  text "DWG NO:" at 293.37,-60.96 h1.14
  text "SCALE:" at 346.71,-60.96 h1.14
  text "NSW 2086" at 222.25,-63.5 h1.78
  text ".PCB_FILE_NAME_NO_PATH" at 256.54,-64.008 h1.78
  text "1" at 3.717,-69.469 h1.78
  text "2" at 52.756,-69.469 h1.78
  text "3" at 102.015,-69.469 h1.78
  text "4" at 151.308,-69.469 h1.78
  text "5" at 200.584,-69.469 h1.78
  text "6" at 249.606,-69.469 h1.78
  text "7" at 299.136,-69.469 h1.78
  text "8" at 348.158,-69.469 h1.78
Drill Drawing:
  text ".Legend" at 0,-8 h0.75

## Dimensions
34.5,-51.301 to 36.6,102 on Dimensions
0,0 to 69,0 on Dimensions
0,0 to 0.001,95.5 on Dimensions

## Text inside footprints (layer, text, board x,y; h text height)
U7: Bottom Overlay "2" at 21.8,76.8 h0.8 r90; Bottom Overlay "3" at 21.8,74.3 h0.8 r90; Bottom Overlay "1" at 20.8,80.1 h0.8 r90